# Allegro board MY_TEST801.brd
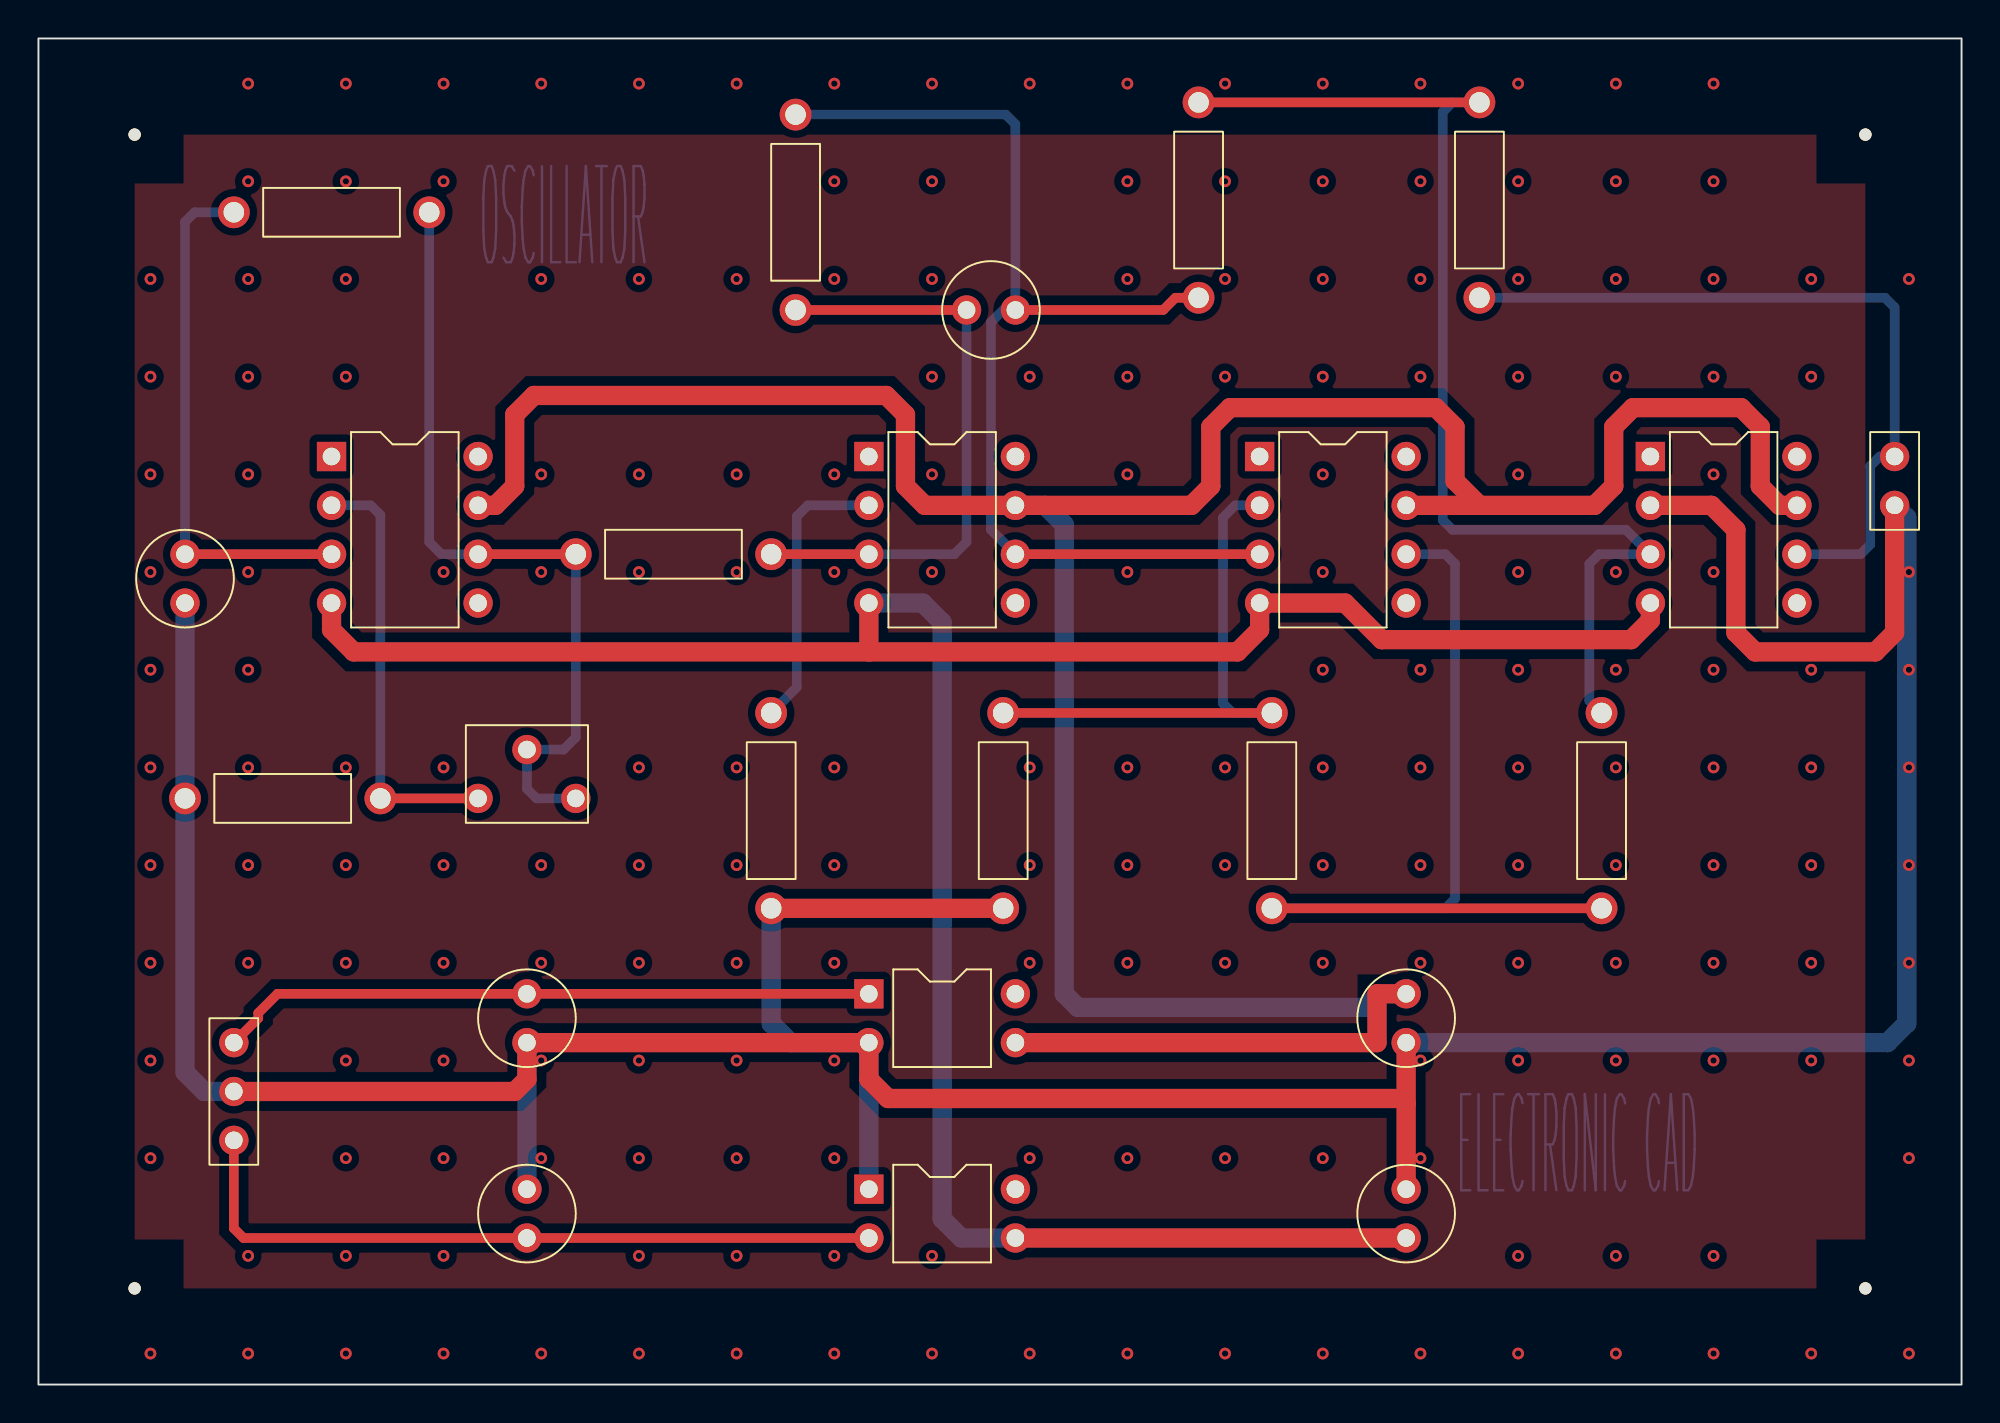
[diagram p0: board, top side]
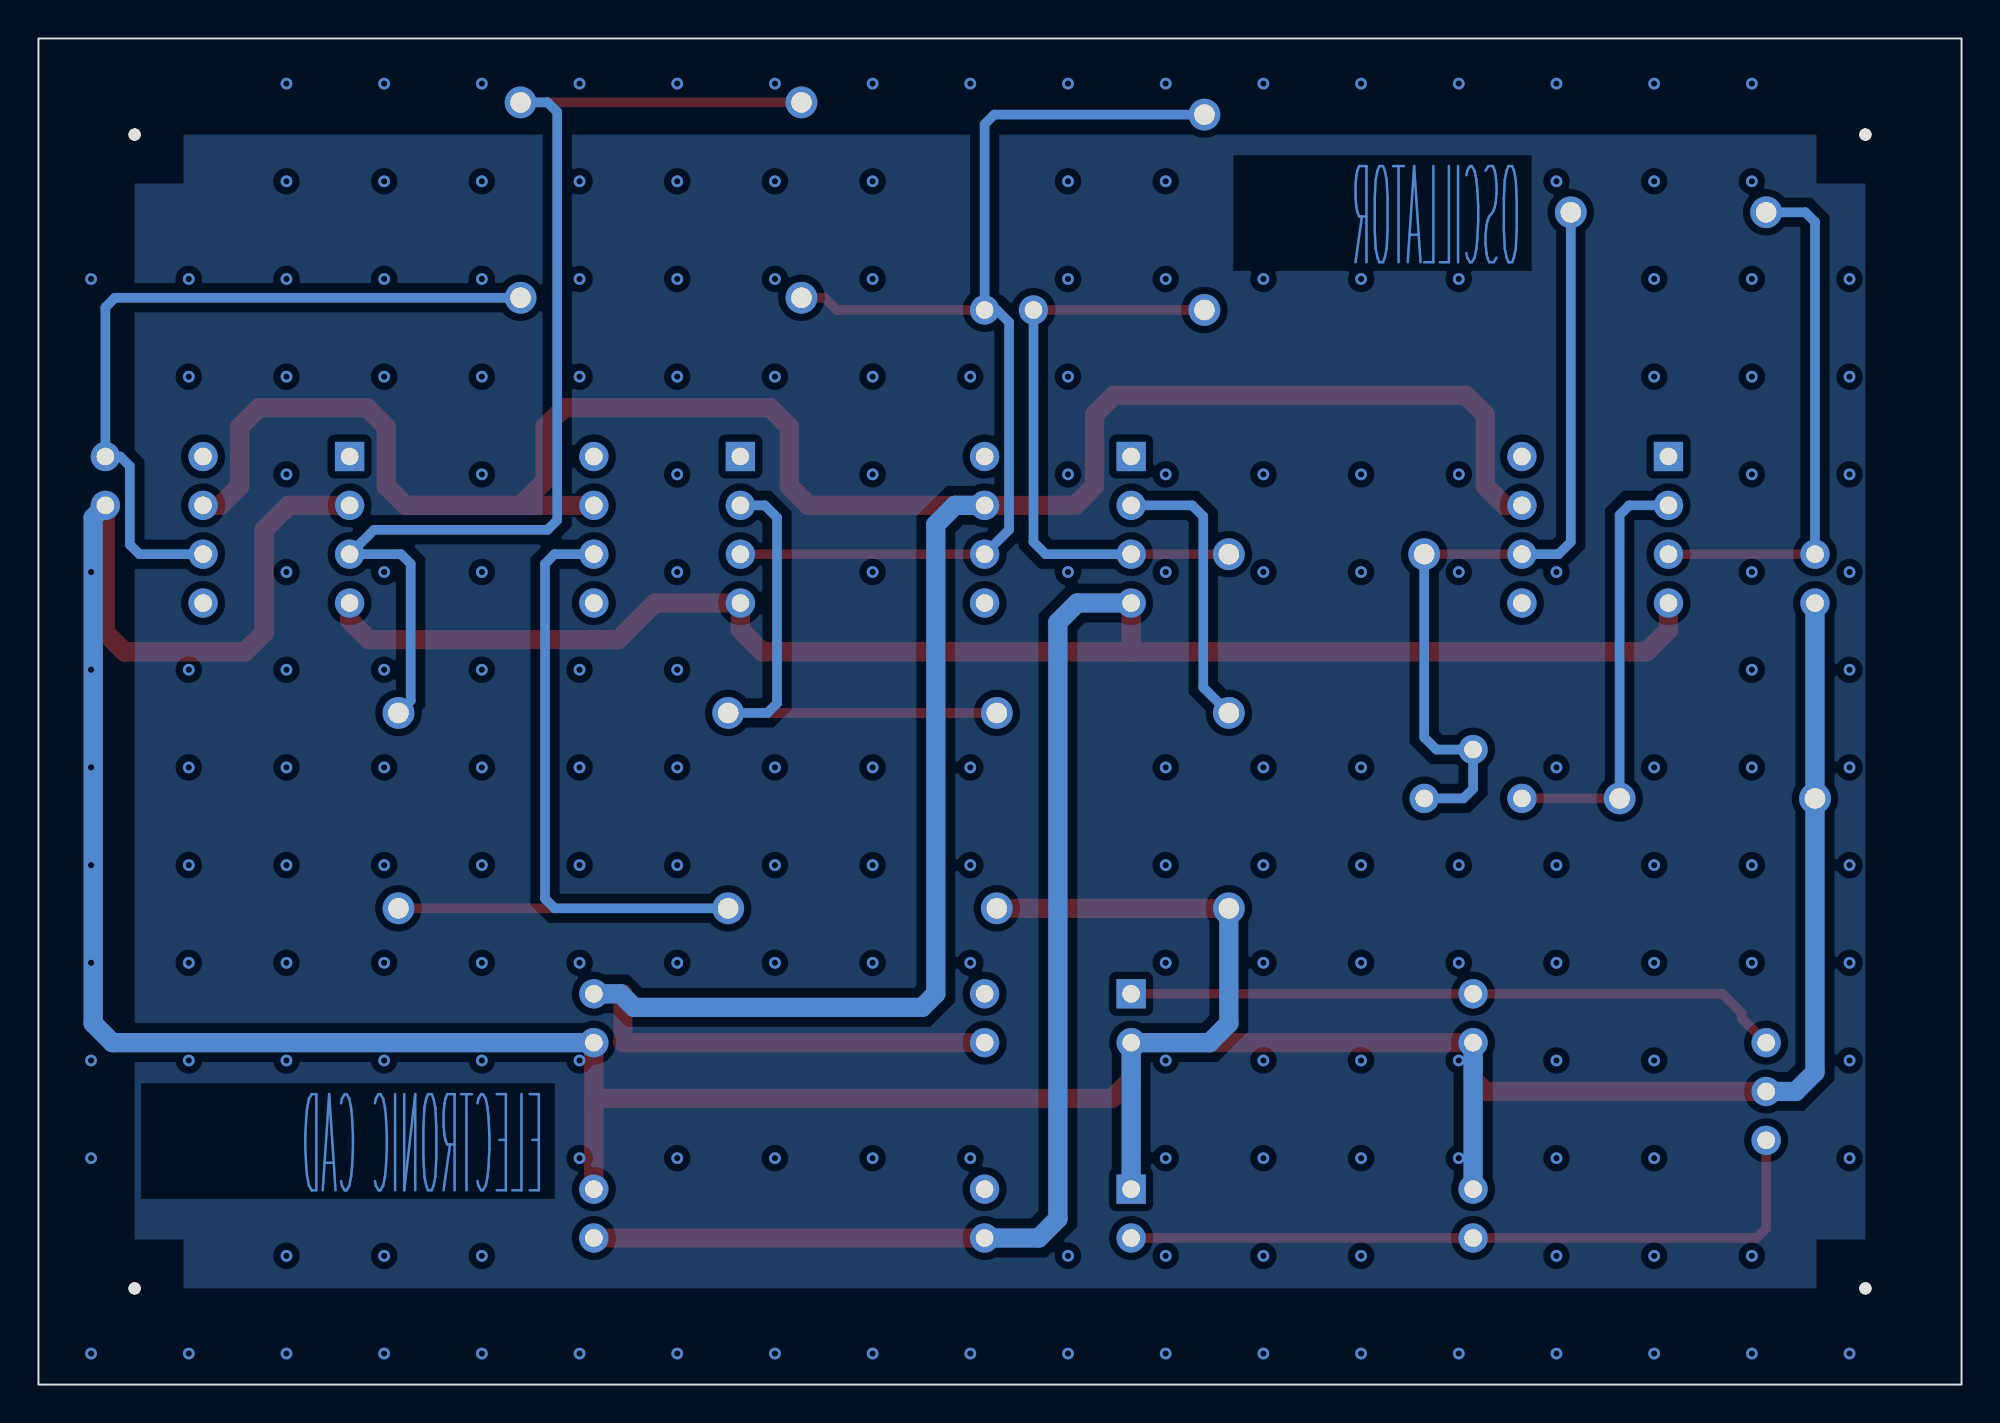
[diagram p1: board, bottom side, seen from below]

Outline 100 x 70 mm; copper layers: TOP, BOTTOM. Coordinates in mm from the lower left corner of the outline.
Outline path: rectangle 0,0 100,70

## Design rules (mm)
constraint set DEFAULT: min track width 0.5, pair gap 0.5
net group POWERNETS: nets +VCC -VCC GND

## Placement (name value [footprint] x y rotation side)
C1  0.001uF  [CAP196]  50.8 55.88 90 top
C2  270pF  [CAP196]  7.62 40.64 0 top
C3  0.1uF  [CAP196]  25.4 17.78 0 top
C4  0.1uF  [CAP196]  71.12 17.78 0 top
C5  0.1uF  [CAP196]  25.4 7.62 0 top
C6  0.1uF  [CAP196]  71.12 7.62 0 top
J1  CON2  [JUMPER2]  96.52 48.26 270 top
J2  CON3  [JUMPER3]  10.16 17.78 270 top
NOREF  -  []  100 0 90 top
NOREF#2  -  [unnamed#2]  95 65 0 top
NOREF#3  -  [unnamed#2]  5 65 0 top
NOREF#4  -  [unnamed#2]  95 5 0 top
NOREF#5  -  []  0 70 0 top
NOREF#6  -  [unnamed#2]  5 5 0 top
R1  10K  [RES400]  10.16 60.96 270 top
R2  100K  [RES400]  39.37 55.88 0 top
R3  10K  [RES400]  60.33 56.52 0 top
R4  10K  [RES400]  74.93 66.67 180 top
R5  62K  [RES400]  27.94 43.18 270 top
R6  10K  [RES400]  38.1 24.77 0 top
R7  10K  [RES400]  81.28 24.77 0 top
R8  10K  [RES400]  17.78 30.48 90 top
R9  10K  [RES400]  64.14 34.92 180 top
R10  10K  [RES400]  50.16 24.77 0 top
U1  LF351  [DIP8_3]  15.24 48.26 0 top
U2  LF351  [DIP8_3]  43.18 48.26 0 top
U3  LF351  [DIP8_3]  63.5 48.26 0 top
U4  LF351  [DIP8_3]  83.82 48.26 0 top
U5  LM7812/TO  [DIP4_3]  43.18 20.32 0 top
U7  LM7912C  [DIP4_3]  43.18 10.16 0 top
VR1  1M  [RESADJ]  27.94 30.48 270 top

## Library data of the parts
C1-C6 = C: Tolerance: ***; User Part Number: ***
J1 = CON2: User Part Number: ***
J2 = CON3_0: User Part Number: ***
R1-R10 = R: Tolerance: ***; User Part Number: ***
U1-U4 = LF351_3: Tolerance: ***; User Part Number: ***
U5 = LM7812/TO_2: Tolerance: ***; User Part Number: ***
U7 = LM7912C_1: Tolerance: ***; User Part Number: ***
VR1 = POT: Tolerance: ***; User Part Number: ***

## Footprints (pads in the part's own frame, mm; a bottom-side part is the same pattern mirrored in y, then rotated)
CAP196
  round 1.524 hole 0.914: 1(0,0) 2(0,2.54)
DIP4_3
  rect 1.524x1.524 hole 0.914: 1(0,0)
  round 1.524 hole 0.914: 2(0,-2.54) 3(7.62,-2.54) 4(7.62,0)
DIP8_3
  rect 1.524x1.524 hole 0.914: 1(0,0)
  round 1.524 hole 0.914: 2(0,-2.54) 3(0,-5.08) 4(0,-7.62) 5(7.62,-7.62) 6(7.62,-5.08) 7(7.62,-2.54) 8(7.62,0)
JUMPER2
  round 1.524 hole 0.914: 1(0,0) 2(2.54,0)
JUMPER3
  round 1.524 hole 0.914: 1(0,0) 2(2.54,0) 3(5.08,0)
RES400
  round 1.651 hole 1.067: 1(0,0) 2(0,10.16)
RESADJ
  round 1.524 hole 0.914: 1(0,0) 2(-2.54,-2.54) 3(0,-5.08)
unnamed#2
  round 0.635 hole 3.175 unplated: (0,0)

## Nets
+VCC: C4.2 U1.7 U2.7 U3.7 U4.7 U5.3(VOUT)
-VCC: C6.1 U1.4(V-) U2.4(V-) U3.4(V-) U4.4(V-) U7.3(VOUT)
GND: C2.1 C3.1 C4.1 C5.2 C6.2 J1.2 J2.2 R6.1 R8.2 R10.1 U4.2 U5.2 U7.1
OUT: J1.1 R4.2 U4.6
SIG: C1.1 R2.2 R3.1 U2.6 U3.3
N00315: C2.2 R1.1 U1.3
N00335: R1.2 R5.1 U1.6 VR1.1 VR1.2(WIPER)
N00409: R8.1 U1.2 VR1.3
N00448: C1.2 R2.1 R5.2 U2.3
N00452: R6.2 U2.2
N00691: R3.2 R4.1 R7.2 U4.3
N00703: R7.1 R9.2 U3.6
N00761: R9.1 R10.2 U3.2
N01137: C3.2 J2.1 U5.1
N01152: C5.1 J2.3 U7.2

Pads without a net: U1 1 5 8; U2 1 5 8; U3 1 5 8; U4 1 5 8; U5 4; U7 4

## Via types
v1: diameter 0.61, hole 0.33, TOP to BOTTOM, 200 vias

## Routing (per net, layer and track width the routed paths; a pad name or vN(x,y) marks a point on that pad's centre or on a via; arc(x,y) is an arc through that point)
+VCC: length 165.5
  TOP w1: U5.3 69.6,17.78 69.6,20.32 C4.2 ; 74.93,45.72 73.66,46.99 73.66,49.8 72.66,50.8 61.96,50.8 60.96,49.8 60.96,46.72 59.96,45.72 U2.7 46.09,45.72 45.09,46.72 45.09,50.44 44.09,51.44 25.77,51.44 24.77,50.44 24.77,46.72 23.77,45.72 U1.7 ; 74.93,45.72 U3.7 ; 74.93,45.72 80.92,45.72 81.92,46.72 81.92,49.8 82.92,50.8 88.53,50.8 89.53,49.8 89.53,46.72 90.53,45.72 U4.7
  BOTTOM w1: C4.2 69.73,20.32 69.02,19.61 54.05,19.61 53.34,20.32 53.34,44.72 52.34,45.72 U2.7
-VCC: length 136.7
  TOP w1: 43.18,38.1 62.35,38.1 63.5,39.25 U3.4 67.94,40.64 69.85,38.73 82.82,38.73 83.82,39.73 U4.4 ; 43.18,38.1 16.39,38.1 15.24,39.25 U1.4 ; 43.18,38.1 U2.4 ; U7.3 C6.1
  BOTTOM w1: U7.3 47.99,7.62 46.99,8.62 46.99,39.64 45.99,40.64 U2.4
GND: length 219
  TOP w1: C4.1 71.12,14.61 ; 71.12,14.61 70.85,14.88 44.18,14.88 43.18,15.88 U5.2 C3.1 25.4,15.88 24.77,15.24 J2.2 ; 71.12,14.61 C6.2 ; J1.2 96.52,39.1 95.52,38.1 89.27,38.1 88.27,39.1 88.27,44.45 87,45.72 U4.2 ; R6.1 R10.1
  BOTTOM w1: C3.1 C5.2 ; J1.2 97.16,45.09 97.16,18.78 96.16,17.78 C4.1 ; J2.2 8.62,15.24 7.62,16.24 R8.2 C2.1 ; U7.1 U5.2 39.1,17.78 38.1,18.78 R6.1
  vias: v1(5.82,57.49) v1(5.82,52.41) v1(5.82,47.33) v1(5.82,42.25) v1(5.82,37.17) v1(5.82,32.09) v1(5.82,27.01) v1(5.82,21.93) v1(5.82,16.85) v1(5.82,11.77) v1(5.82,1.61) v1(10.9,67.65) v1(10.9,62.57) v1(10.9,57.49) v1(10.9,52.41) v1(10.9,47.33) v1(10.9,42.25) v1(10.9,37.17) v1(10.9,32.09) v1(10.9,27.01) v1(10.9,21.93) v1(10.9,6.69) v1(10.9,1.61) v1(15.98,67.65) v1(15.98,62.57) v1(15.98,57.49) v1(15.98,52.41) v1(15.98,32.09) v1(15.98,27.01) v1(15.98,21.93) v1(15.98,16.85) v1(15.98,11.77) v1(15.98,6.69) v1(15.98,1.61) v1(21.06,67.65) v1(21.06,62.57) v1(21.06,42.25) v1(21.06,32.09) v1(21.06,27.01) v1(21.06,21.93) v1(21.06,16.85) v1(21.06,11.77) v1(21.06,6.69) v1(21.06,1.61) v1(26.14,67.65) v1(26.14,57.49) v1(26.14,47.33) v1(26.14,42.25) v1(26.14,27.01) v1(26.14,21.93) v1(26.14,16.85) v1(26.14,11.77) v1(26.14,1.61) v1(31.22,67.65) v1(31.22,57.49) v1(31.22,47.33) v1(31.22,42.25) v1(31.22,32.09) v1(31.22,27.01) v1(31.22,21.93) v1(31.22,16.85) v1(31.22,11.77) v1(31.22,6.69) v1(31.22,1.61) v1(36.3,67.65) v1(36.3,57.49) v1(36.3,47.33) v1(36.3,42.25) v1(36.3,32.09) v1(36.3,27.01) v1(36.3,21.93) v1(36.3,16.85) v1(36.3,11.77) v1(36.3,6.69) v1(36.3,1.61) v1(41.38,67.65) v1(41.38,62.57) v1(41.38,57.49) v1(41.38,47.33) v1(41.38,42.25) v1(41.38,32.09) v1(41.38,27.01) v1(41.38,21.93) v1(41.38,16.85) v1(41.38,11.77) v1(41.38,6.69) v1(41.38,1.61) v1(46.46,67.65) v1(46.46,62.57) v1(46.46,57.49) v1(46.46,52.41) v1(46.46,47.33) v1(46.46,42.25) v1(46.46,6.69) v1(46.46,1.61) v1(51.54,67.65) v1(51.54,52.41) v1(51.54,32.09) v1(51.54,27.01) v1(51.54,21.93) v1(51.54,11.77) v1(51.54,1.61) v1(56.62,67.65) v1(56.62,62.57) v1(56.62,57.49) v1(56.62,52.41) v1(56.62,47.33) v1(56.62,42.25) v1(56.62,32.09) v1(56.62,27.01) v1(56.62,21.93) v1(56.62,11.77) v1(56.62,1.61) v1(61.7,67.65) v1(61.7,62.57) v1(61.7,57.49) v1(61.7,52.41) v1(61.7,32.09) v1(61.7,27.01) v1(61.7,21.93) v1(61.7,11.77) v1(61.7,1.61) v1(66.78,67.65) v1(66.78,62.57) v1(66.78,57.49) v1(66.78,52.41) v1(66.78,47.33) v1(66.78,42.25) v1(66.78,37.17) v1(66.78,32.09) v1(66.78,27.01) v1(66.78,21.93) v1(66.78,11.77) v1(66.78,1.61) v1(71.86,67.65) v1(71.86,62.57) v1(71.86,57.49) v1(71.86,52.41) v1(71.86,37.17) v1(71.86,32.09) v1(71.86,27.01) v1(71.86,21.93) v1(71.86,16.85) v1(71.86,11.77) v1(71.86,1.61) v1(76.94,67.65) v1(76.94,62.57) v1(76.94,57.49) v1(76.94,52.41) v1(76.94,47.33) v1(76.94,42.25) v1(76.94,37.17) v1(76.94,32.09) v1(76.94,27.01) v1(76.94,21.93) v1(76.94,16.85) v1(76.94,6.69) v1(76.94,1.61) v1(82.02,67.65) v1(82.02,62.57) v1(82.02,57.49) v1(82.02,52.41) v1(82.02,42.25) v1(82.02,37.17) v1(82.02,32.09) v1(82.02,27.01) v1(82.02,21.93) v1(82.02,16.85) v1(82.02,6.69) v1(82.02,1.61) v1(87.1,67.65) v1(87.1,62.57) v1(87.1,57.49) v1(87.1,52.41) v1(87.1,47.33) v1(87.1,42.25) v1(87.1,37.17) v1(87.1,32.09) v1(87.1,27.01) v1(87.1,21.93) v1(87.1,16.85) v1(87.1,6.69) v1(87.1,1.61) v1(92.18,57.49) v1(92.18,52.41) v1(92.18,37.17) v1(92.18,32.09) v1(92.18,27.01) v1(92.18,21.93) v1(92.18,16.85) v1(92.18,1.61) v1(97.26,57.49) v1(97.26,42.25) v1(97.26,37.17) v1(97.26,32.09) v1(97.26,27.01) v1(97.26,21.93) v1(97.26,16.85) v1(97.26,11.77) v1(97.26,1.61)
OUT: length 39.1
  BOTTOM w0.5: U4.6 94.75,43.18 95.25,43.68 95.25,47.76 95.75,48.26 J1.1 96.52,56.02 96.02,56.52 R4.2
SIG: length 57.9
  TOP w0.5: C1.1 58.49,55.88 59.12,56.52 R3.1 ; U2.6 U3.3
  BOTTOM w0.5: R2.2 50.3,66.04 50.8,65.54 C1.1 50.16,55.88 49.53,55.24 49.53,44.45 U2.6
N00315: length 27.6
  TOP w0.5: C2.2 U1.3
  BOTTOM w0.5: C2.2 7.62,60.46 8.12,60.96 R1.1
N00335: length 42.1
  TOP w0.5: U1.6 R5.1
  BOTTOM w0.5: VR1.1 25.9,30.48 25.4,30.98 VR1.2 27.3,33.02 27.94,33.66 R5.1 ; U1.6 20.95,43.18 20.32,43.81 R1.2
N00409: length 22.6
  TOP w0.5: R8.1 VR1.3
  BOTTOM w0.5: U1.2 17.28,45.72 17.78,45.22 R8.1
N00448: length 31.4
  TOP w0.5: R2.1 C1.2 ; R5.2 U2.3
  BOTTOM w0.5: U2.3 47.62,43.18 48.26,43.81 C1.2
N00452: length 14.8
  BOTTOM w0.5: U2.2 40.01,45.72 39.43,45.15 39.43,36.26 R6.2
N00691: length 60.9
  TOP w0.5: R3.2 R4.1
  BOTTOM w0.5: R7.2 80.64,35.56 80.64,42.68 81.14,43.18 U4.3 82.55,44.45 73.53,44.45 73.03,44.95 73.03,66.17 73.53,66.67 R4.1
N00703: length 47
  TOP w0.5: R9.2 R7.1
  BOTTOM w0.5: R9.2 73.16,24.77 73.66,25.27 73.66,42.68 73.16,43.18 U3.6
N00761: length 28.5
  TOP w0.5: R10.2 R9.1
  BOTTOM w0.5: U3.2 62.23,45.72 61.59,45.09 61.59,35.42 62.09,34.92 R9.1
N01137: length 34.2
  TOP w0.5: U5.1 C3.2 12.43,20.32 11.43,19.32 11.43,19.05 J2.1
N01152: length 37.8
  TOP w0.5: U7.2 C5.1 10.66,7.62 10.16,8.12 J2.3

## Copper pours and planes (outline as drawn; the poured copper is in the pictures)
Net_1 on TOP: 95,5 95,65 5,65 5,5
Net_2 on BOTTOM: 95,5 95,65 5,65 5,5

## Text on the board
BOTTOM: OSCILLATOR | ELECTRONIC CAD
DIMENSION: FIGURE | FINISHED_SIZE | 0.914 | 1.067 | 3.175 | DRILL CHART: TOP to BOTTOM | ALL UNITS ARE IN MILLIMETERS | PLATED | NON-PLATED | QTY | 60 | 20 | 4
